# EAGLE board LEDBlink (EAGLE 9.2.2)
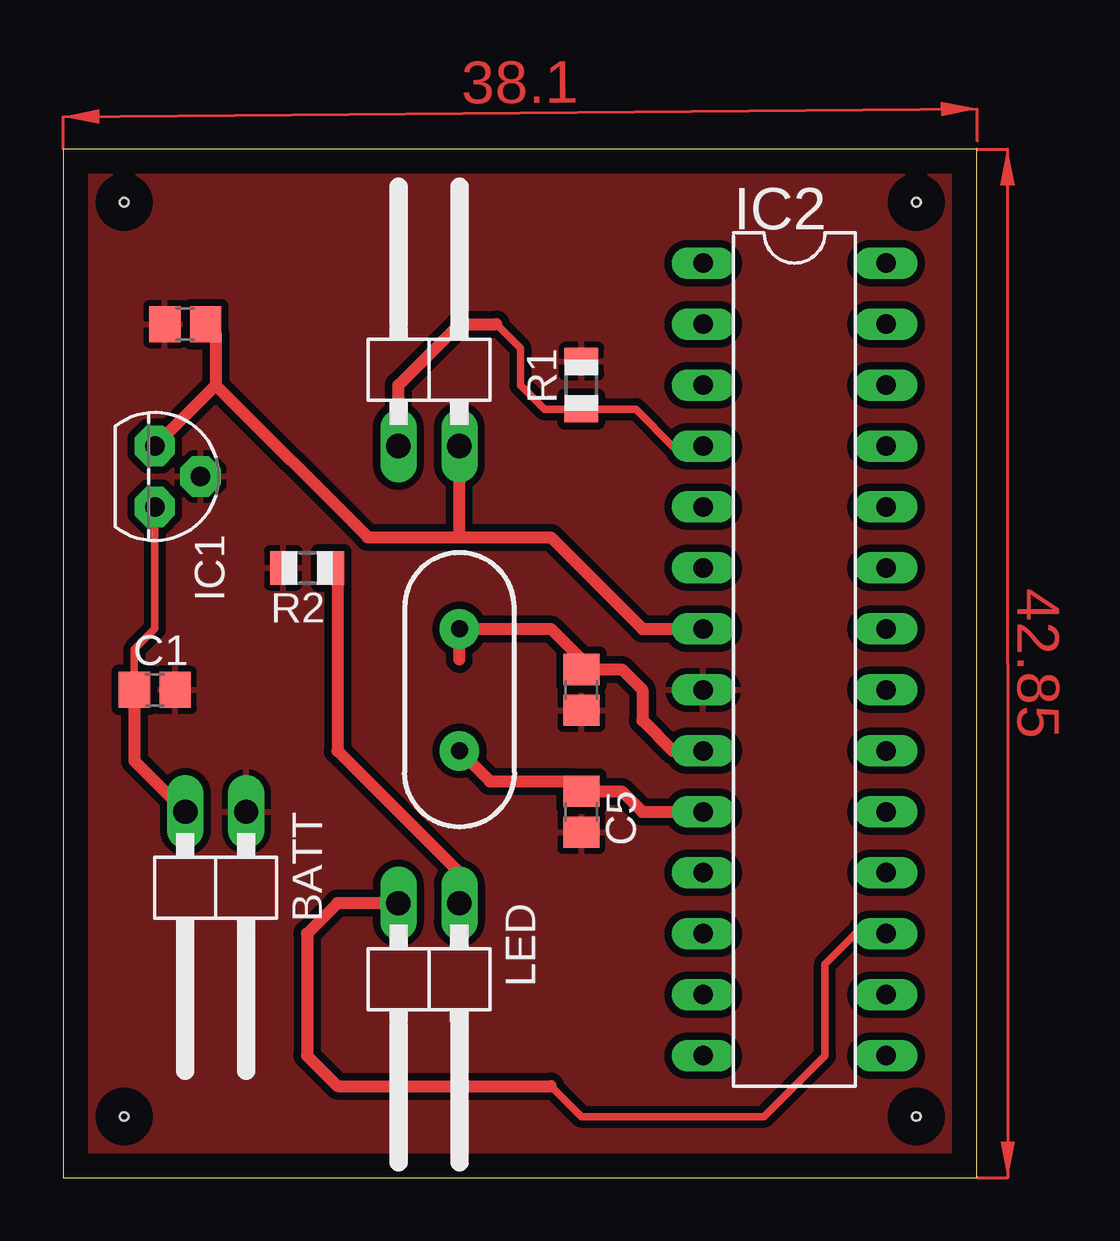
[diagram p0: board, top side]

Size 38.08 x 42.85 mm. Coordinates in mm from the lower left corner, seen from the top.
Outline: 0,0 38.08,0 38.08,42.85 0,42.85 0,0
Copper layers (1*16): Top 0.035mm / dielectric 1.5mm / Bottom 0.035mm
Design rules "default *": minimum track width 6mil, minimum drill 0.35mm, track to track 12mil, track to pad 12mil, pad to pad 12mil, via to via 12mil, smd to smd 6mil, copper to edge 40mil, drill to drill 6mil, minimum pad ring 10mil, minimum via ring 8mil, stop-mask expansion 4mil, vias tented up to drill 0mil, thermal gap 10mil
Net classes: 0 default: width 0.305 mm, drill 0.508 mm, clearance 0.254 mm
Holes 0.35 mm at 2.54,40.64 35.56,40.64 35.56,2.54 2.54,2.54

## Footprints (pad centres in the part's own frame; a part is rotated, then mirrored left to right if it is on the bottom)
1X02/90 = drill 1.016 long: 1 -1.27,-3.81; 2 1.27,-3.81
C0805 = smd 1.3 x 1.5: 1 -0.85,0; 2 0.85,0
TO92 = drill 0.813 pad 1.676 octagon: 1 -1.27,0; 2 0,1.905; 3 1.27,0
DIL28-3 = drill 0.813 long: 1 -16.51,-3.81; 2 -13.97,-3.81; 3 -11.43,-3.81; 4 -8.89,-3.81; 5 -6.35,-3.81; 6 -3.81,-3.81; 7 -1.27,-3.81; 8 1.27,-3.81; 9 3.81,-3.81; 10 6.35,-3.81; 11 8.89,-3.81; 12 11.43,-3.81; 13 13.97,-3.81; 14 16.51,-3.81; 15 16.51,3.81; 16 13.97,3.81; 17 11.43,3.81; 18 8.89,3.81; 19 6.35,3.81; 20 3.81,3.81; 21 1.27,3.81; 22 -1.27,3.81; 23 -3.81,3.81; 24 -6.35,3.81; 25 -8.89,3.81; 26 -11.43,3.81; 27 -13.97,3.81; 28 -16.51,3.81
R0805 = smd 1.1 x 1.4: 1 -1,0; 2 1,0
HC49US = drill 0.7 pad 1.651: 1 -2.54,0; 2 2.54,0

## Placement (x,y rotation side)
BATT  [1X02/90]  6.35,11.43 180 top
BUTTON  [1X02/90]  15.24,34.29 0 top
C1  0.47uF  [C0805]  3.81,20.32 0 top
C2  0.1uF  [C0805]  5.08,35.56 180 top
C3  22pF  [C0805]  21.59,20.32 270 top
C5  22pF  [C0805]  21.59,15.24 270 top
IC1  7805L  [TO92]  3.81,29.21 270 top
IC2  ATMEGA328-20P  [DIL28-3]  30.48,21.59 270 top
LED  RED  [1X02/90]  15.24,7.62 180 top
R1  20k  [R0805]  21.59,33.02 90 top
R2  150  [R0805]  10.16,25.4 180 top
Y1  16MHz  [HC49US]  16.51,20.32 270 top

## Library data of the parts
BATT BUTTON LED = pinhead
C1-C3 C5 IC1 R1 R2 = adafruit
IC2 = atmega328
Y1 = SparkFun-Clocks; PROD_ID: XTAL-08181; SF_ID: COM-00536

## Nets
+5V: BUTTON.2 C2.1 IC1.1 IC2.7
BATT: BATT.2 C1.1 IC1.3
GND: BATT.1 C1.2 C2.2 C3.2 C5.2 IC1.2 IC2.8 R1.2 R2.2
N$1: C3.1 IC2.9 Y1.1
N$3: LED.1 R2.1
N$10: C5.1 IC2.10 Y1.2
PWM_PIN: IC2.17 LED.2
SWN: BUTTON.1 IC2.4 R1.1

## Tracks (layer width: path | path; a pad name or v marks a point on that pad's centre or on a via)
+5V
  Top 0.508: C2.1 6.35,35.14 6.35,33.02 | 6.35,33.02 IC1.1 | 6.35,33.02 12.7,26.67 16.51,26.67 | 16.51,26.67 BUTTON.2 | 16.51,26.67 20.32,26.67 24.13,22.86 IC2.7
BATT
  Top 0.305: IC1.3 3.81,22.86 2.96,22.01 C1.1
  Top 0.508: 4.77,15.55 BATT.2 | 5.08,16.51 BATT.2 | C1.1 2.96,17.36 BATT.2
GND
  pour Top: -3.81,44.45 40.64,44.45 40.64,-2.54 -2.54,-2.54 -2.54,43.18
N$1
  Top 0.508: IC2.9 25.4,17.78 24.13,19.05 24.13,20.32 23.28,21.17 C3.1 21.59,21.59 20.32,22.86 Y1.1 16.51,21.59
N$3
  Top 0.508: R2.1 11.43,25.13 11.43,17.78 16.51,12.7 LED.1
N$10
  Top 0.508: 25.4,15.24 IC2.10 24.13,15.24 23.28,16.09 C5.1 21.17,16.51 17.78,16.51 Y1.2
PWM_PIN
  Top 0.305: 20.32,3.81 21.59,2.54 29.21,2.54 31.75,5.08 31.75,8.89 33.02,10.16 IC2.17
  Top 0.508: 20.32,3.81 11.43,3.81 10.16,5.08 10.16,10.16 11.43,11.43 LED.2
SWN
  Top 0.305: IC2.4 25.4,30.48 23.86,32.02 R1.1 20.05,32.02 19.05,33.02 19.05,34.56 18.05,35.56
  Top 0.508: BUTTON.1 13.97,33.02 16.51,35.56 18.05,35.56
(copper drawn outside any net)
  shapes: Top area x2